# Altium PCB Power_Board.PcbDoc
Units mil, origin at the board's own origin, x right, y up, seen from the top; angles counter-clockwise.
Board outline 6000 x 4000 mil, 2 copper layers (Top Layer, Bottom Layer); 20 components, 7 nets, 57 pads, 0 vias.
Unrouted connection lines stored in the file: 44.
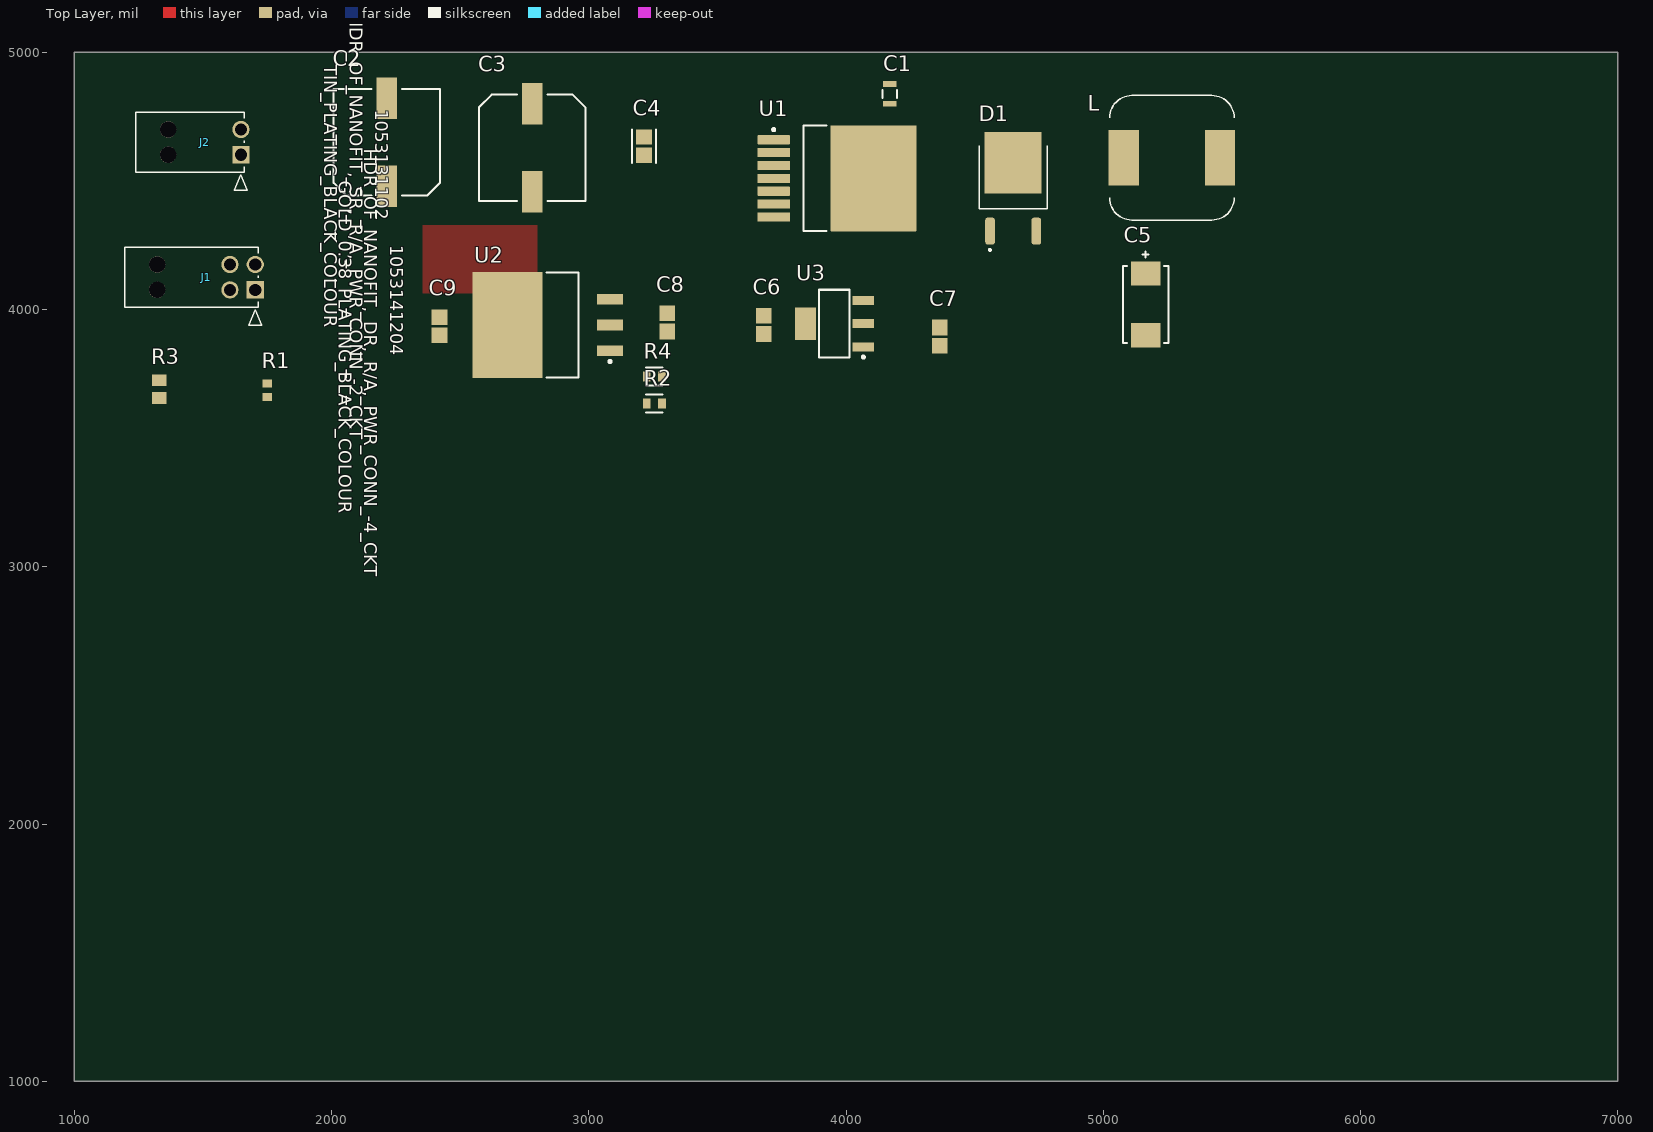
[diagram p0: Top Layer view]
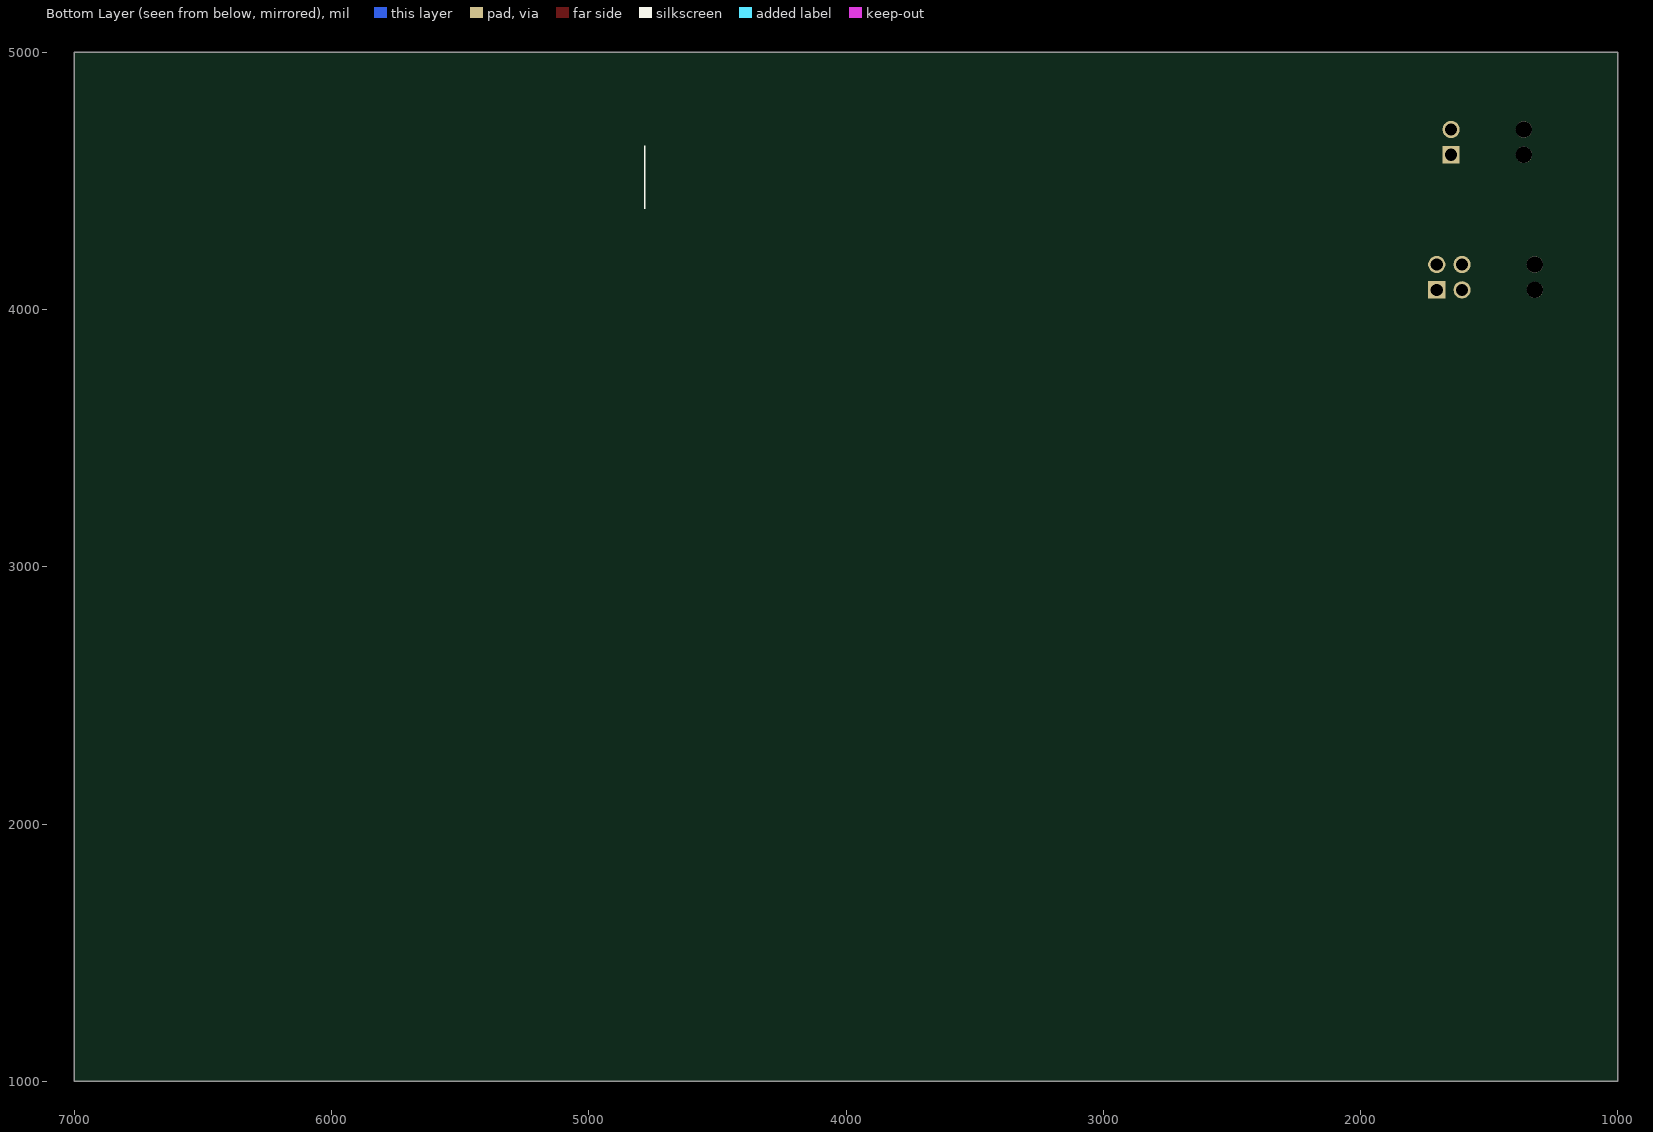
[diagram p1: Bottom Layer view, seen from below]

## Layer stack, top to bottom
Top Solder: solder mask 0.4, Solder Resist, Dk 3.5
Top Layer: signal copper 1.4
Dielectric 1: dielectric 12.6, FR-4, Dk 4.8
Bottom Layer: signal copper 1.4
Bottom Solder: solder mask 0.4, Solder Resist, Dk 3.5

## Board outline
1000,1000 7000,1000 7000,5000 1000,5000

## Design rules (kind name [scope] priority, off if disabled: settings)
AssemblyTestPointUsage SilkToBoardRegionClearance [All] p2:
Clearance "Clearance Pour" [InPolygon] p1: gap=10 ignorepadtopadclearanceinfootprint=FALSE except(0: Arc-Hole Track-Hole SMDPad-Hole THPad-Hole Via-Hole Fill-Hole Poly-Hole Region-Hole Text-Hole)
Clearance "Clearance Pad" [(IsPad) vs (IsPad)] p2: gap=5.5 ignorepadtopadclearanceinfootprint=FALSE except(0: Arc-Hole Track-Hole SMDPad-Hole THPad-Hole Via-Hole Fill-Hole Poly-Hole Region-Hole Text-Hole)
Clearance [All] p3: gap=6 ignorepadtopadclearanceinfootprint=FALSE except(0: Arc-Hole Track-Hole SMDPad-Hole THPad-Hole Via-Hole Fill-Hole Poly-Hole Region-Hole Text-Hole)
ComponentClearance [All] p1: gap=0 collisioncheckmode=3 verticalgap=0 showdistances=FALSE
Height [All] p1: minheight=0 maxheight=2000 prefheight=500
HoleSize [All] p1: absolutevalues=TRUE maxlimit=250 minlimit=10 maxpercent=80.000 minpercent=20.000
HoleSize Testpoint [All] p2: absolutevalues=TRUE maxlimit=100 minlimit=1 maxpercent=80.000 minpercent=20.000
HoleSize TestPointUsage [All] p3: absolutevalues=TRUE maxlimit=100 minlimit=1 maxpercent=80.000 minpercent=20.000
MinimumAnnularRing [All] p1: minimumring=5
MinimumSolderMaskSliver [All] p1 off: minsoldermaskwidth=5
MinimumSolderMaskSliver SilkscreenOverComponentPads [All] p2 off: minsoldermaskwidth=10
PasteMaskExpansion [All] p1: expansion=2
PlaneClearance [All] p1: clearance=10
PlaneConnect [All] p1: planeconnectstyle=Direct reliefexpansion=20 reliefentries=4 reliefconductorwidth=20 reliefairgap=10
PolygonConnect PolygonConnect_5V [InNet('5V') vs InNet('3V3')] p1: connectstyle=Relief reliefconductorwidth=50 reliefentries=4 polygonreliefangle="90 Angle" airgapwidth=10
PolygonConnect PolygonConnectPads [(InPadClass('All Pads')) And Not InNet('5V') And Not InNet('3V3')] p2: connectstyle=Relief reliefconductorwidth=10 reliefentries=4 polygonreliefangle="90 Angle" airgapwidth=10
PolygonConnect [All] p3: connectstyle=Direct reliefconductorwidth=20 reliefentries=4 polygonreliefangle="90 Angle" airgapwidth=10
RoutingVias [All] p1: holewidth=10 width=22 viastyle="Through Hole" minholewidth=10 minwidth=20 maxholewidth=250 maxwidth=1000
SilkToBoardRegionClearance SilkToBoardRegionClearance_1 [All] p1:
SilkToSilkClearance [All] p1 off: silktosilkclearance=5
SilkToSolderMaskClearance [IsPad] p1 off: minsilkscreentomaskgap=10 clearancetoexposedcopper=TRUE
SolderMaskExpansion [All] p1: expansion=4 istentingtop=FALSE
Width Width_1 [All] p1: maxlimit=10000 minlimit=5 preferedwidth=10
20 further rules are at their usual default settings.

## Components (designator, comment, footprint, x,y, rotation, side; value= is the part's Value field where it differs from the comment)
C1 "CGA4C2C0G1H103J060AA" FP-CGA4J-IPC_C 4170,4838.39 r90 top
C2 "EEHZA1H101P" FP-ZAG-MFG 2215,4650 r270 top value=100uF
C3 "EEHZA1H101P" FP-ZAG-MFG 2780,4628.74 r90 top value=100uF
C4 "C0805C104M5RACTU" FP-C0805C-DN-IPC_A 3215,4635 r90 top value="0.10 μF"
C5 "10TPE220MIL" FP-POSCAP-D3L-MFG 5165,4020 r90 top
C6 "TAJR104K020RNJ" CAPC2113X120X50ML20T30 3680,3940 r90 top
C7 "TAJR106K006RNJ" CAPC2113X120X50ML20T30 4365,3895 r90 top
C8 "TAJR106K006RNJ" CAPC2113X120X50ML20T30 3305,3950 r90 top
C9 "TAJR106K006RNJ" CAPC2113X120X50ML20T30 2420,3935 r90 top
D1 "SBRD10200TR" DPAK228P1005X240-4N 4650,4471.93 r0 top
J1 "1053141204" CON_1053141204 1703.43,4076.57 r270 top
J2 "1053131102" CON_1053131102 1647.68,4601.57 r270 top
L "MSS1210-153MEB" IND_MSS1210-153MEB 5267.01,4590 r90 top
R1 "ERJ-3EKF2100V" RESC1608X55X30NL15T15 1750,3686.57 r90 top
R2 "CRCW0603121RFKEA" FP-CRCW0603-e3-MFG 3255,3635 r180 top
R3 "ERJ-6ENF2942V" RESC2013X70X40NL20T20 1330,3690.55 r270 top
R4 "CRCW0603365RFKEA" FP-CRCW0603-e3-MFG 3255,3740 r0 top
U1 "LM2678S-12/NOPB" KTW0007B_L 3965,4510 r0 top
U2 "LM1084IS-3.3/NOPB" KTT0003B_L 2840,3940 r180 top
U3 "LD1117AS33TR" SOT-223_L 3955,3945 r180 top

## Footprints (in the part's own frame and the unit in brackets; to place one, negate y for a bottom-side part, rotate by r counter-clockwise, add the part's x,y. Pads: shape width x height; smd on the part's side, far side on the other; paste and mask are expansions set on the pad)
CAPC2113X120X50ML20T30 [mm] "Chip Capacitor, 2-Leads, Body 2.05x1.25mm, IPC Low Density"
  rect 1.55x1.55 smd: 1(-0.9,0) 2(0.9,0)
  body extent -1.13,-0.72 1.12,0.72, height 1.2
CON_1053131102 [mm]
  rect 1.7x1.7 hole 1.2 mask+0.076: 1(0,0)
  round 1.7 hole 1.2 mask+0.076: 2(-2.5,0)
  round 1.6 hole 1.6 unplated mask+0.076: 3(0,-7.18) 4(-2.5,-7.18)
  silkscreen extent -4.22,-10.38 3.5,0.64, body extent 0,0 0.25,0.25, height 0.25
CON_1053141204 [mm]
  rect 1.7x1.7 hole 1.2 mask+0.076: 1(0,0)
  round 1.7 hole 1.2 mask+0.076: 2(-2.5,0) 3(0,-2.5) 4(-2.5,-2.5)
  round 1.6 hole 1.6 unplated mask+0.076: 5(0,-9.68) 6(-2.5,-9.68)
  silkscreen extent -4.22,-12.88 3.5,0.64, body extent 0,0 0.25,0.25, height 0.25
DPAK228P1005X240-4N [mm]
  rrect50% 0.95x2.64 smd: 1(-2.286,-4.24) 3(2.286,-4.24)
  rect 5.63x6.09 smd paste-4: 2(0,2.51)
  silkscreen extent -3.35,-6.2 3.35,4.18
FP-C0805C-DN-IPC_A [mil]
  rect 59.24x61.27 smd paste+0 mask+0: 1(-35.46,0) 2(35.46,0)
  silkscreen extent -65,-46 65,46, body extent -85,-50 85,50, height 10
FP-CGA4J-IPC_C [mm]
  rect 0.556x1.356 smd paste+0 mask+0: 1(-0.975,0) 2(0.975,0)
  silkscreen extent -0.4,-0.73 0.4,0.73, body extent -1.35,-0.82 1.35,0.82, height 0.25
FP-CRCW0603-e3-MFG [mm]
  rect 0.75x1 smd paste+0 mask+0: 1(-0.75,0) 2(0.75,0)
  silkscreen extent -0.8,-0.9 0.8,0.9, body extent -1.22,-0.6 1.22,0.6, height 0.25
FP-POSCAP-D3L-MFG [mm]
  rect 2.4x2.9 smd paste+0 mask+0: 1(-3.05,0) 2(3.05,0)
  silkscreen extent -3.8,-2.25 5.22,2.25, body extent -4.35,-2.35 4.35,2.35, height 0.25
FP-ZAG-MFG [mm]
  rect 4.1x2 smd paste+0 mask+0: 1(-4.35,0) 2(4.35,0)
  silkscreen extent -5.25,-5.25 5.25,5.25, body extent -6.65,-5.5 6.65,5.5, height 0.25
IND_MSS1210-153MEB [mm]
  rect 5.5x3 smd: 1(0,4.75) 2(0,-4.75)
  silkscreen extent -6.15,-6.15 6.15,6.15
KTT0003B_L [mm] "D2-PAK, 3-Leads, Body 10.41x8.89mm, Pitch 2.54mm, IPC High Density"
  rect 2.55x1.05 smd: 1(-6.15,2.54) 2(-6.15,0) 3(-6.15,-2.54)
  rect 6.9x10.45 smd: 4(3.95,0)
  silkscreen extent -6.28,-5.2 0.1,5.2, body extent -6.83,-5.2 7.52,5.2, height 4.64
KTW0007B_L [mm] "DPAK, 7-Leads, Body 9.4x10.4mm, Pitch 1.27mm, IPC High Density"
  rrect11% 3.2x0.9 smd: 1(-6.25,3.81) 2(-6.25,2.54) 3(-6.25,1.27) 4(-6.25,0) 5(-6.25,-1.27) 6(-6.25,-2.54) 7(-6.25,-3.81)
  rrect1% 8.5x10.45 smd: 8(3.6,0)
  silkscreen extent -6.37,-5.2 -1.05,5.2, body extent -3.3,-5.2 6.1,5.2, height 4.65
RESC1608X55X30NL15T15 [mm] "Chip Resistor, 2-Leads, Body 1.60x0.80mm, IPC Medium Density"
  rect 0.8x0.95 smd: 1(-0.675,0) 2(0.675,0)
  body extent -0.87,-0.48 0.87,0.48, height 0.55
RESC2013X70X40NL20T20 [mm] "Chip Resistor, 2-Leads, Body 2.00x1.25mm, IPC Medium Density"
  rect 1.15x1.45 smd: 1(-0.875,0) 2(0.875,0)
  body extent -1.1,-0.72 1.1,0.72, height 0.7
SOT-223_L [mm] "SOT223, 4-Leads, Body 6.5x3.5mm, Pitch 2.3mm, Lead Span 7mm, IPC High Density"
  rect 2.1x0.9 smd: 1(-2.85,2.3) 2(-2.85,0) 3(-2.85,-2.3)
  rect 2.1x3.2 smd: 4(2.85,0)
  silkscreen extent -2.98,-3.35 1.5,3.42, body extent -1.85,-3.35 1.85,3.35, height 1.8

## Part data
C1: library part CMP-05428-001379-1, "Conductive Polymer Aluminum Solid Capacitors (OS-CON) 39uF ±20% 35V RADIAL SMT 8x6.9mm", Capacitance=10nF, Case Code (Imperial)=0805, Case Code (Metric)=2012, Dielectric=C0G, Max Operating Temperature=125°C, Min Operating Temperature=-55°C, Package Quantity=1, Ratings=AEC-Q200, Tolerance=5%, Voltage Rating=50V, Case/Package=0805, Composition=Ceramic, Depth=1.25mm, Height=0.6mm, Lead Free="Lead Free", Length=2mm, Mount="Surface Mount", Packaging="Tape and Reel", Radiation Hardening=No, REACH SVHC="No SVHC", Termination=SMD/SMT, Thickness=0.028inch, Voltage Rating (DC)=50V, Weight=0.000194oz, Width=0.049inch
C2: library part CMP-05428-001333-1, "Conductive Polymer Aluminum Solid Capacitors (OS-CON) 120uF ±20% 20V", Capacitance=100uF, Leakage Current=50uA, Manufacturer=Panasonic, Package=ZAG, Ripple Current=2000mA, Temperature="-55°C to +105°C", Temperature Range High=+105°C, Temperature Range Low=-55°C, Tolerance=20%, Voltage=50V, Automotive=Yes, Automotive Grade="Grade 2", Category=Cap, ComponentLink2Description=Datasheet, ComponentLink2URL=https://industrial.panasonic.com/cdbs/www-data/pdf/RDD0000/ABA0000C1221.pdf, Device Class L1="Passive Components", Device Class L2=Capacitors, Device Class L3="Polymer Capacitors", Digikey Description="CAP ALUM POLY HYB 100UF 50V SMD", Dissipation Factor=10%, Esr=28mΩ, Footprint Url=https://industrial.panasonic.com/cdbs/www-data/pdf/RDD0000/DMD0000COL4.pdf, Height=10.5mm, Lead Free=Yes, Life=10000Hours, Manufacturer Part Number=EEHZA1H101P, Material="Conductive Polymer", Mounting Type="Surface Mount", Mouser Description="Cap Aluminum Polymer Hybrid 100uF 50VDC 20% (10 X 10.2mm) SMD 0.028 Ohm 2000mA 10000h 105C Embossed T/R", Octopart=https://octopart.com/eeh-za1h101p-panasonic-22287466, RoHS=TRUE, Voltage Rating=50V
C3: library part CMP-2000-05172-1, "Capacitor, Tantalum, 10 uF, +/- 10%, 10 V, -55 to 125 degC, 2-Pin SMD (1206), RoHS, Tape and Reel", Capacitance=100uF, Leakage Current=50uA, Manufacturer=Panasonic, Package=ZAG, Ripple Current=2000mA, Temperature="-55°C to +105°C", Temperature Range High=+105°C, Temperature Range Low=-55°C, Tolerance=20%, Voltage=50V, Automotive=Yes, Automotive Grade="Grade 2", Category=Cap, ComponentLink2Description=Datasheet, ComponentLink2URL=https://industrial.panasonic.com/cdbs/www-data/pdf/RDD0000/ABA0000C1221.pdf, Device Class L1="Passive Components", Device Class L2=Capacitors, Device Class L3="Polymer Capacitors", Digikey Description="CAP ALUM POLY HYB 100UF 50V SMD", Dissipation Factor=10%, Esr=28mΩ, Footprint Url=https://industrial.panasonic.com/cdbs/www-data/pdf/RDD0000/DMD0000COL4.pdf, Height=10.5mm, Lead Free=Yes, Life=10000Hours, Manufacturer Part Number=EEHZA1H101P, Material="Conductive Polymer", Mounting Type="Surface Mount", Mouser Description="Cap Aluminum Polymer Hybrid 100uF 50VDC 20% (10 X 10.2mm) SMD 0.028 Ohm 2000mA 10000h 105C Embossed T/R", Octopart=https://octopart.com/eeh-za1h101p-panasonic-22287466, RoHS=TRUE, Voltage Rating=50V
C4: library part CMP-03017-000031-1, "CAP TANT 100UF 10% 6.3V 1411", Capacitance="0.10 μF", Manufacturer=KEMET, Package=C0805C-DN, Temperature="-55°C to +125°C", Temperature Characteristic=X7R, Temperature Coefficient=30ppm/°C, Temperature Range High=+125°C, Temperature Range Low=-55°C, Tolerance=0.2, Voltage Rating="50 V", Automotive=No, Category=Cap, ComponentLink2Description=Datasheet, ComponentLink2URL=https://content.kemet.com/datasheets/KEM_C1003_C0G_SMD.pdf, Device Class L1="Passive Components", Device Class L2=Capacitors, Device Class L3="Ceramic Capacitors", Digikey Description="CAP CER 0.1UF 50V X7R 0805", Height=0.88mm, Ipc Land Pattern Name=CAPC200125X78, Lead Free=Yes, Manufacturer Part Number=C0805C104M5RACTU, Material=Ceramic, Mouser Description="Multilayer Ceramic Capacitors MLCC - SMD/SMT 50volts 0.1uF X7R 20%", Octopart=https://octopart.com/c0805c104m5ractu-kemet-129379, RoHS=TRUE
C5: library part CMP-2000-05172-1, "Capacitor, Tantalum, 10 uF, +/- 10%, 10 V, -55 to 125 degC, 2-Pin SMD (1206), RoHS, Tape and Reel", Capacitance=220uF, Case Code (Imperial)=2917, Case Code (Metric)=7343, ESR (Equivalent Series Resistance)=18mR, Leakage Current=220uA, Max Operating Temperature=105°C, Min Operating Temperature=-55°C, Package Quantity=2500, Ripple Current=2.8A, Tolerance=20%, Voltage=10V, Case/Package=2917, Construction=Flat, Depth=4.3mm, Dissipation Factor=10%, Features="General Purpose", Height=2.8mm, Height - Seated (Max)=0.118inch, Lead Free="Lead Free", Length=7.3mm, Mount="Surface Mount", Packaging="Tape and Reel", Polarity=Polar, Radiation Hardening=No, REACH SVHC="No SVHC", RoHS Compliant=Yes, Series="POSCAP™ TPE", Termination=SMD/SMT, Voltage Rating=10V, Voltage Rating (DC)=10V, Width=0.169inch
C6 C7: library part CMP-05428-001379-1, "Conductive Polymer Aluminum Solid Capacitors (OS-CON) 39uF ±20% 35V RADIAL SMT 8x6.9mm", Manufacturer="AVX Interconnect / Elco"
  C6: Part Number=TAJR104K020RNJ
  C7: Part Number=TAJR106K006RNJ
C8 C9: library part CMP-2007-04026-1, Manufacturer="AVX Interconnect / Elco", Part Number=TAJR106K006RNJ
D1: "SBRD10200 Series 200 V 10 A Surface Mount Schottky Rectifier - TO-252-3", Package=None, Availability=Unavailable, MP=SBRD10200TR, Price=None
J1 J2: "No Description Available", Mfr_Name="Molex Connector Corporation", Copyright="Copyright (C) 2022 Ultra Librarian. All rights reserved.", RefDes=RefDes, Type=DEV
  J1: Manufacturer_Part_Number=1053141204
  J2: Manufacturer_Part_Number=1053131102
L: "Power inductor, shielded, 10/20% tol, SMT, RoHS", Package=None, Availability=Unavailable, MF=Coilcraft, MP=MSS1210-153MEB, Price=None, SnapEDA_Link=https://www.snapeda.com/parts/MSS1210-153MEB/Coilcraft/view-part/681728/?ref=snap
R1: library part CMP-2001-00277-1, Manufacturer=Panasonic, Part Number=ERJ-3EKF2100V
R2: library part CMP-2001-04388-1, Case Code (Imperial)=0603, Case Code (Metric)=1608, Max Operating Temperature=155°C, Max Power Dissipation=100mW, Min Operating Temperature=-55°C, Package Quantity=10, Resistance=121R, Temperature Coefficient=100ppm/°C, Tolerance=1%, Voltage Rating=75V, Case/Package=0603, Composition="Thick Film", Contact Plating=Tin, Depth=0.85mm, Features="Automotive AEC-Q200", Height=0.45mm, Lead Free="Lead Free", Length=1.55mm, Military Standard=Not, Number of Terminations=2, Packaging="Tape and Reel", Power Rating=100mW, Radiation Hardening=No, Termination=SMD/SMT, Voltage Rating (DC)=75V, Weight=7.1E-05oz, Width=0.033inch
R3: library part CMP-2000-00329-1, Manufacturer=Panasonic, Part Number=ERJ-6ENF2942V
R4: library part CMP-2000-00409-1, Case Code (Imperial)=0603, Case Code (Metric)=1608, Max Operating Temperature=155°C, Max Power Dissipation=100mW, Min Operating Temperature=-55°C, Package Quantity=10, Resistance=365R, Temperature Coefficient=100ppm/°C, Tolerance=1%, Voltage Rating=75V, Case/Package=0603, Composition="Thick Film", Contact Plating=Tin, Depth=0.85mm, Features="Automotive AEC-Q200", Height=0.02inch, Length=1.55mm, Military Standard=Not, Number of Terminations=2, Packaging="Tape and Reel", Power Rating=100mW, Radiation Hardening=No, Termination=SMD/SMT, Weight=7.1E-05oz, Width=0.85mm
U1: library part CMP-0069-02071-2, "5A SIMPLE SWITCHER® Power Module with 36V Maximum Input Voltage, 7 pin TO-PMOD, 250 Reel", Manufacturer="Texas Instruments", PackageTopMarking=NSUZXYTTE#*LM2678*S-12, PowerWise=N, Code_JEDEC=MO-169-AC, ComponentLink1Description="Datasheet URL", ComponentLink1URL=http://www.ti.com/general/docs/lit/getliterature.tsp?genericPartNumber=LM2678&fileType=pdf, CompType=Switcher, PackageDescription="TO-263, Molded, .400 x .390 x .180in Body, 7 Lead, .050in Pitch, Surface Mount", PackageReference=KTW0007B, PinCount=7, RoHS=Y
U2: library part CMP-0062-00552-5, "1.5A Low Dropout Positive Regulators, 3-pin TO-263, Pb-Free", Manufacturer="Texas Instruments", PackageTopMarking=NSUZXYTTE#*LM1084*IS-3.3, PowerWise=N, Code_JEDEC=MO-169-AA, ComponentLink1Description="Datasheet URL", ComponentLink1URL=http://www.ti.com/general/docs/lit/getliterature.tsp?genericPartNumber=LM1084&fileType=pdf, CompType="LDO IC", High-Reliability=Y, PackageDescription="TO-263, Molded, .400 x .390 x .180in, 3 Lead, .1in Pitch, Surface Mount", PackageReference=KTT0003B, PartNumber=LM1084IS-3.3/NOPB, PinCount=3, RoHS=Y
U3: library part CMP-0062-00142-3, "3A Fast Ultra Low Dropout Linear Regulator, 5-pin TO-263, Pb-Free", ComponentLink1Description="Manufacturer URL", ComponentLink1URL=http://www.st.com, ComponentLink2Description=Datasheet, ComponentLink2URL=http://www.st.com/internet/com/TECHNICAL_RESOURCES/TECHNICAL_LITERATURE/DATASHEET/CD00002116.pdf, DatasheetVersion=2/12/2011, PackageDescription="4-Pin SOT-223 Package, 6.5 x 3.5 mm Body, 2.3 mm Pitch, 7 mm Lead Span", PackageReference=SOT-223, PackageVersion=2010

## Nets (pads, with @x,y where several pads share a name; then routed paths per layer and width w, separated by ;. In a path a pad name is that pad's centre, name@x,y a point inside that pad or via, vN(x,y) a via of type N, cw(c..) or ccw(c..) an arc to the next point about the centre after c; other vN are vias at no path point)
3V3: C7.2 J1.2 U3.2 U3.4
5V: C9.2 J1.1 R2.2 U2.2 U2.4
FB: C2.1 C2.2 C3.1 C3.2 C4.1 C4.2 C5.1 C5.2 C6.1 C6.2 C7.1 C8.1 C8.2 C9.1 D1.1 D1.3 J1.4 J2.1 J2.2 L.2 R1.2 R3.1 R4.1 U1.2 U1.4 U1.6 U1.7 U2.3 U3.1 U3.3
NetC1_1: C1.1 U1.3
NetC1_2: C1.2 D1.2 L.1 U1.1
NetR2_1: R2.1 R4.2 U2.1
V_Sense: J1.3 R1.1 R3.2
pads on no net: J1.5 J1.6 J2.3 J2.4 U1.5 U1.8

## Polygon pours and split planes (outlines as drawn)
5V on Top Layer "5V_L01_P002" (solid, pour order 2): 2800,4062.5 2355,4062.5 2355,4327.5 2800,4327.5

## Text inside footprints (layer, text, board x,y; h text height)
J1: Top 3D Body "HDR_OF_NANOFIT,_DR,_R/A,_PWR_CONN_-4_CKT" at 2127.4,4625.79 h50 r270; Top 3D Body "GOLD_0.38_PLATING_BLACK_COLOUR" at 2027.4,4500.79 h50 r270; Top Overlay "HDR_OF_NANOFIT,_DR,_R/A,_PWR_CONN_-4_CKT" at 2127.4,4625.79 h50 r270; Top Overlay "GOLD_0.38_PLATING_BLACK_COLOUR" at 2027.4,4500.79 h50 r270; Mechanical 3 "NOTE" at 865.94,4242.72 h50 r270; Mechanical 3 "MAXIMUM_PACKAGE_HEIGHT:_9.14_MM" at 765.94,4242.72 h50 r270; Mechanical 3 "RECOMMENDED_PCB_THICKNESS:" at 615.94,4242.72 h50 r270; Mechanical 3 "1.6_MM_TO_2.4_MM" at 515.94,4242.72 h50 r270; Mechanical 10 "NOTE" at 865.94,4242.72 h50 r270; Mechanical 10 "MAXIMUM_PACKAGE_HEIGHT:_9.14_MM" at 765.94,4242.72 h50 r270; Mechanical 10 "RECOMMENDED_PCB_THICKNESS:" at 615.94,4242.72 h50 r270; Mechanical 10 "1.6_MM_TO_2.4_MM" at 515.94,4242.72 h50 r270
J2: Top 3D Body "HDR_OF_NANOFIT,_SR,_R/A,_PWR_CONN_-2_CKT" at 2070.91,5150.79 h50 r270; Top 3D Body "TIN_PLATING_BLACK_COLOUR" at 1970.91,4950.79 h50 r270; Top Overlay "HDR_OF_NANOFIT,_SR,_R/A,_PWR_CONN_-2_CKT" at 2070.91,5150.79 h50 r270; Top Overlay "TIN_PLATING_BLACK_COLOUR" at 1970.91,4950.79 h50 r270; Mechanical 3 "NOTE" at 910.28,4767.72 h50 r270; Mechanical 3 "MAXIMUM_PACKAGE_HEIGHT:_6.64_MM" at 810.28,4767.72 h50 r270; Mechanical 3 "RECOMMENDED_PCB_THICKNESS:" at 660.28,4767.72 h50 r270; Mechanical 3 "1.6_MM_TO_2.4_MM" at 560.28,4767.72 h50 r270; Mechanical 10 "NOTE" at 910.28,4767.72 h50 r270; Mechanical 10 "MAXIMUM_PACKAGE_HEIGHT:_6.64_MM" at 810.28,4767.72 h50 r270; Mechanical 10 "RECOMMENDED_PCB_THICKNESS:" at 660.28,4767.72 h50 r270; Mechanical 10 "1.6_MM_TO_2.4_MM" at 560.28,4767.72 h50 r270